# Altium PCB Displayd.PcbDoc
Units mil, origin at the board's own origin, x right, y up, seen from the top; angles counter-clockwise.
Board outline 3255 x 2645 mil, 2 copper layers (Top Layer, Bottom Layer); 12 components, 73 nets, 65 pads, 16 vias.
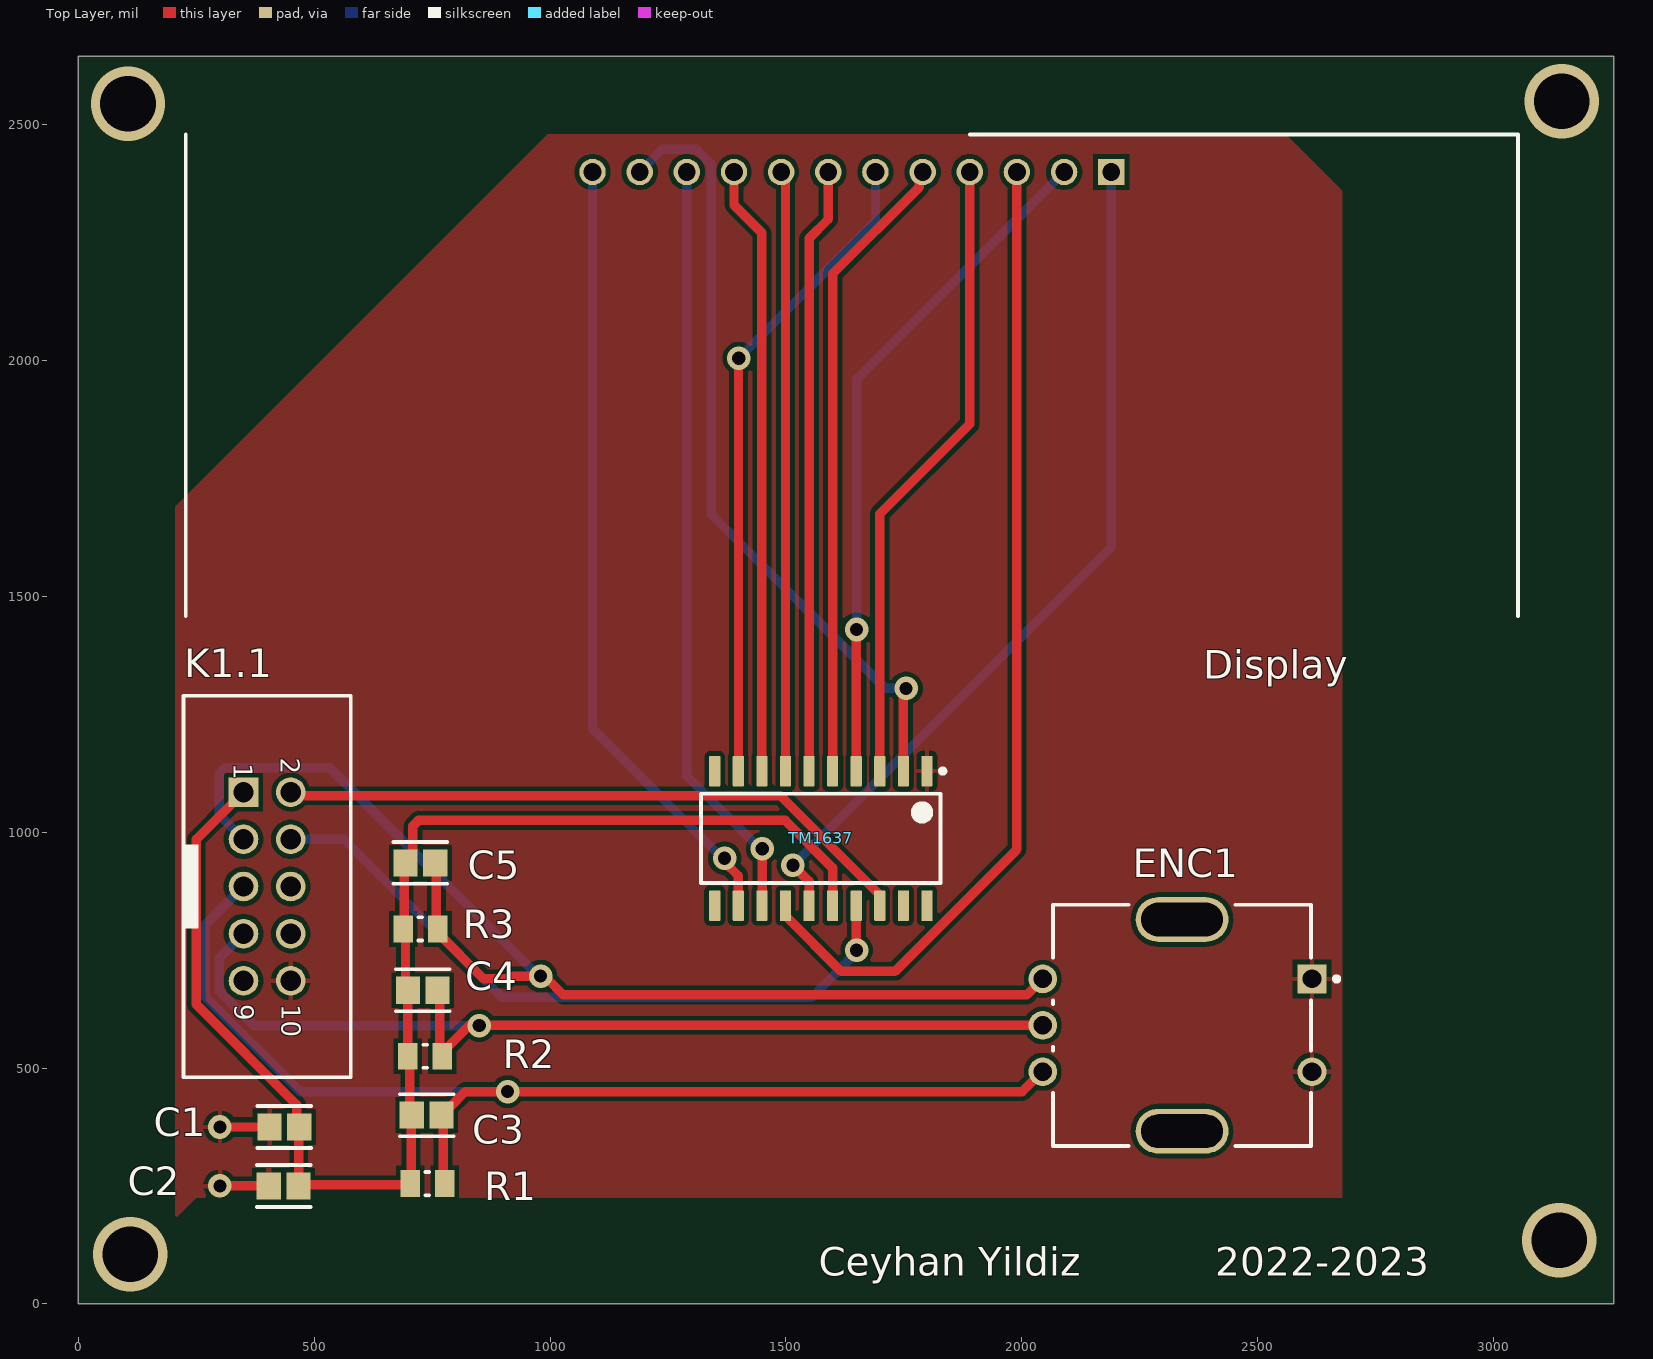
[diagram p0: Top Layer view]
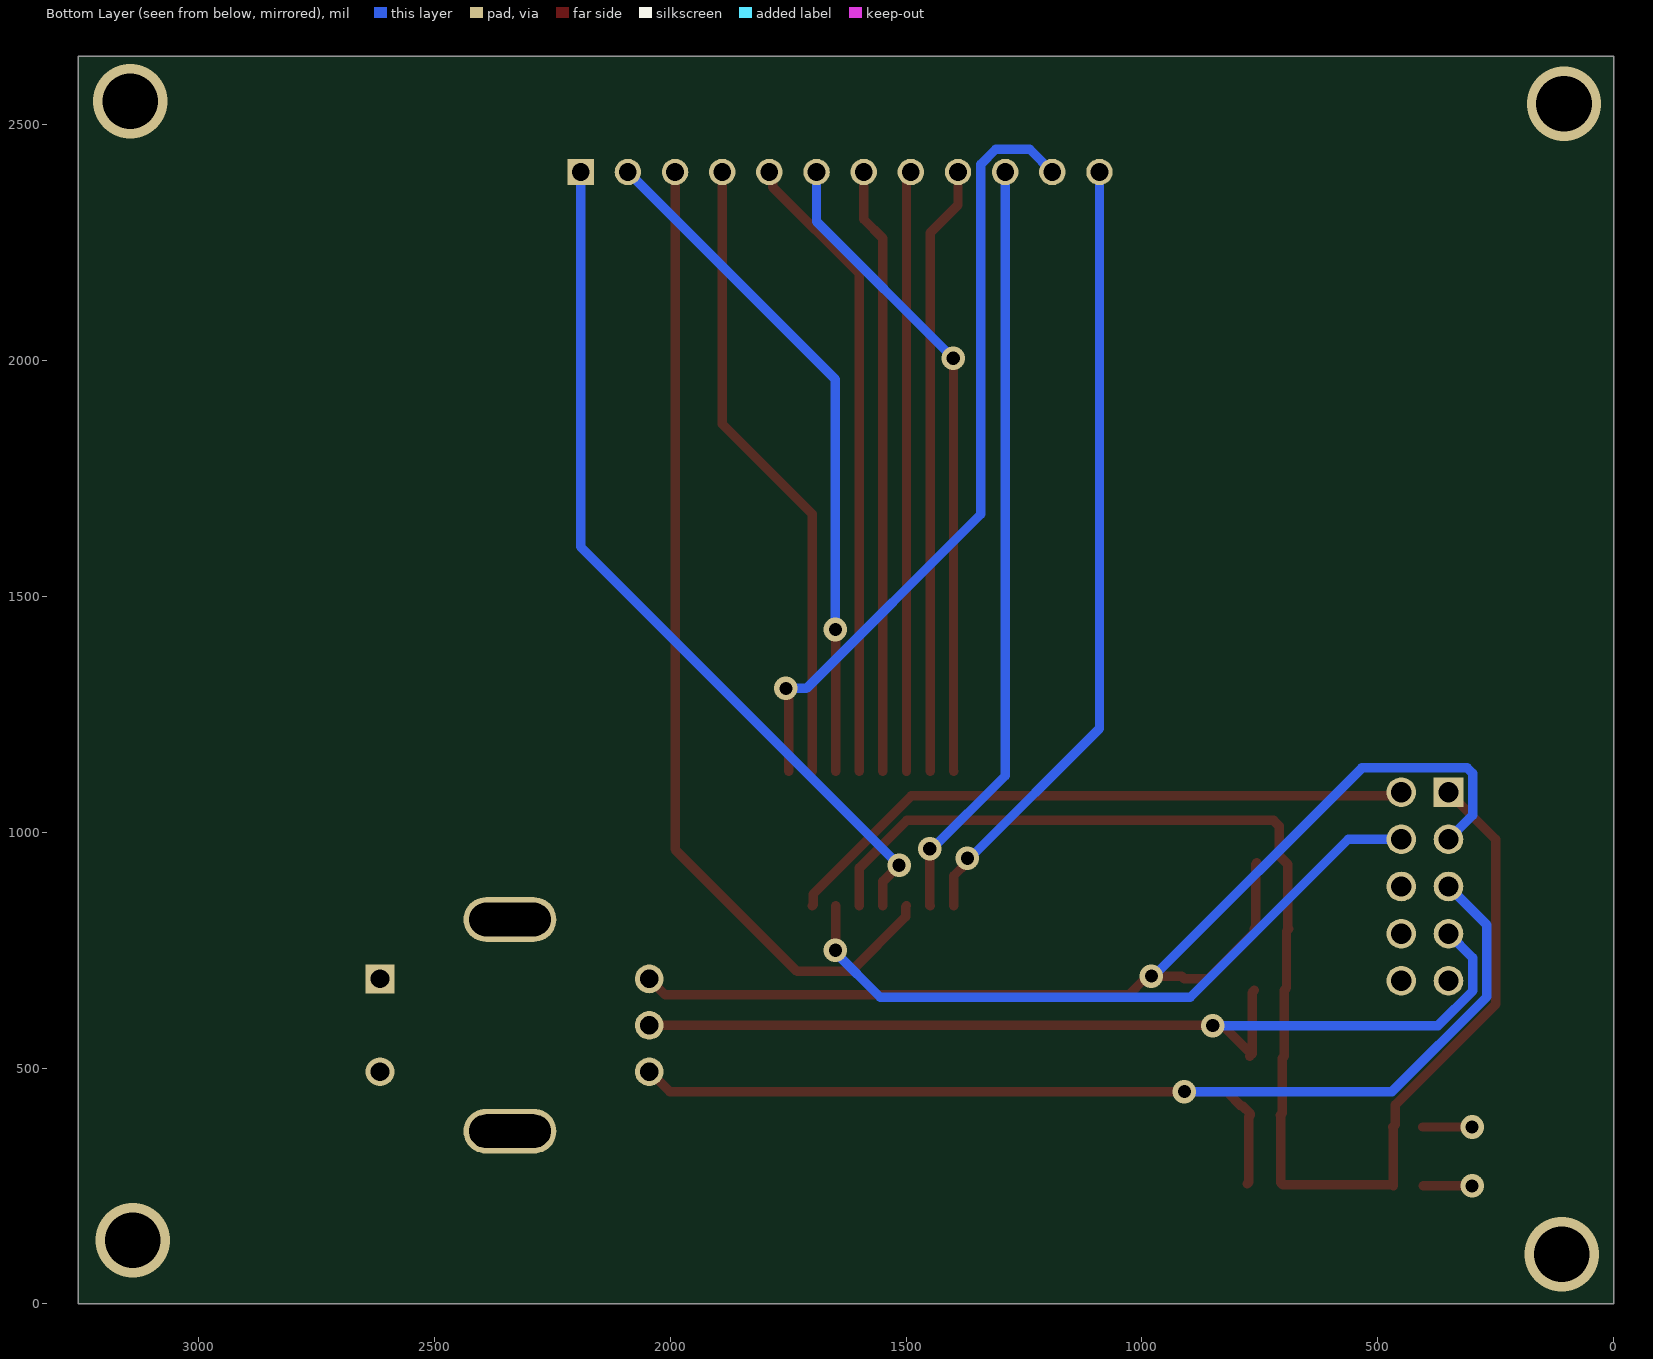
[diagram p1: Bottom Layer view, seen from below]
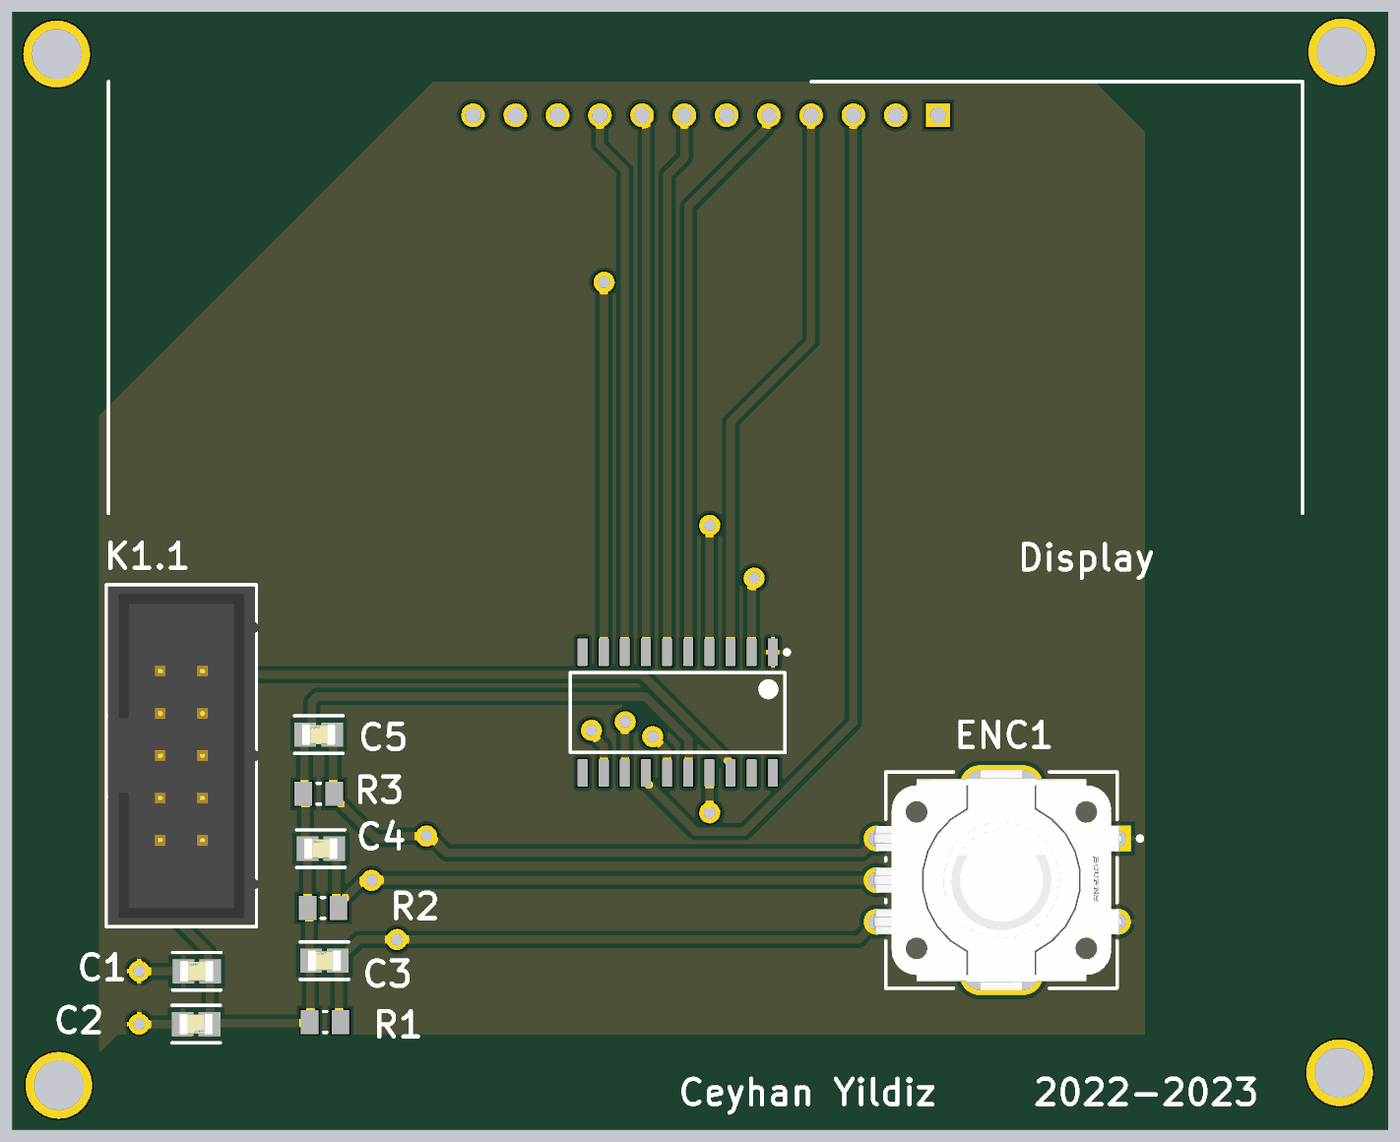
[diagram p2: 3D render of the assembled board from above, using the file's embedded part models]

## Layer stack, top to bottom
Top Solder: solder mask 0.4, Solder Resist, Dk 3.5
Top Layer: signal copper 1.4
Dielectric 1: dielectric 12.6, FR-4, Dk 4.8
Bottom Layer: signal copper 1.4
Bottom Solder: solder mask 0.4, Solder Resist, Dk 3.5

## Board outline
0,0 3255,0 3255,2645 0,2645

## Design rules (kind name [scope] priority, off if disabled: settings)
Clearance [All] p1: gap=10 ignorepadtopadclearanceinfootprint=FALSE except(0: Arc-Hole Track-Hole SMDPad-Hole THPad-Hole Via-Hole Fill-Hole Poly-Hole Region-Hole Text-Hole)
MinimumSolderMaskSliver [All] p1: minsoldermaskwidth=6
PolygonConnect [All] p1: connectstyle=Relief reliefconductorwidth=10 reliefentries=4 polygonreliefangle="90 Angle" airgapwidth=10
RoutingVias [All] p1: holewidth=28 width=50 viastyle="Through Hole" minholewidth=28 minwidth=50 maxholewidth=28 maxwidth=50
SilkToSolderMaskClearance [IsText] p1: minsilkscreentomaskgap=10 clearancetoexposedcopper=TRUE
SolderMaskExpansion [All] p1: expansion=4 istentingtop=FALSE
Width [All] p1: maxlimit=100 minlimit=10 preferedwidth=20
28 further rules are at their usual default settings.

## Components (designator, comment, footprint, x,y, rotation, side; value= is the part's Value field where it differs from the comment)
C1 "100µ 50V" CC_0805_L 436.53,375 r0 top
C2 "100n" CC_0805_L 435,250 r180 top value="0.22 μF"
C3 "10n" CC_0805_L 738.47,400 r0 top value="0.22 μF"
C4 "10n" CC_0805_L 730,665 r0 top value="0.22 μF"
C5 "10n" CC_0805_L 725,935 r0 top value="0.22 μF"
Display "Sigment" 7-Sigment 1890,2400 r270 top
ENC1 "ROTARY_ENCODER" PEC11R_4220F_S0012 2340,590.59 r270 top
K1.1 "61201021621" "box header 10-pin" 400,885 r270 top
R1 "10kΩ" R_0805_M 740,255 r180 top
R2 "10kΩ" R_0805_M 735,525 r180 top
R3 "10kΩ" R_0805_M 725,795 r180 top
TM1637 "TM1637" SOP_20_M 1574.15,986.98 r270 top

## Footprints (in the part's own frame and the unit in brackets; to place one, negate y for a bottom-side part, rotate by r counter-clockwise, add the part's x,y. Pads: shape width x height; smd on the part's side, far side on the other; paste and mask are expansions set on the pad)
7-Sigment [mm]
  rect 1.425x1.425 hole 0.95: 1(0,7.62)
  round 1.425 hole 0.95: 2(0,5.08) 3(0,2.54) 4(0,0) 5(0,-2.54) 6(0,-5.08) 7(0,-7.62) 8(0,-10.16) 9(0,-12.7) 10(0,-15.24) 11(0,-17.78) 12(0,-20.32)
  silkscreen extent -2.02,-42.23 23.93,29.53
"box header 10-pin" [mm] "10 pins, straight, gold plating"
  rect 1.6x1.6 hole 1.1: 1(-5.08,-1.27)
  round 1.6 hole 1.1: 2(-5.08,1.27) 3(-2.54,-1.27) 4(-2.54,1.27) 5(0,-1.27) 6(0,1.27) 7(2.54,-1.27) 8(2.54,1.27) 9(5.08,-1.27) 10(5.08,1.27)
  silkscreen extent -10.28,-4.5 10.28,4.5, body extent -10.18,-4.42 10.18,4.75, height 9.13
CC_0805_L [mil]
  rect 51.36x57.33 smd paste+0 mask+0: 1(-31.53,0) 2(31.53,0)
  silkscreen extent -57,-44 57,44, body extent -67,-39 67,39, height 10
PEC11R_4220F_S0012 [mm]
  rect 1.55x1.55 hole 1 paste-1000 mask+0: 1(-2.5,7)
  round 1.55 hole 1 paste-1000 mask+0: 2(2.5,7) A(-2.5,-7.5) B(2.5,-7.5) C(0,-7.5)
  rrect100% 2.4x5 hole 4.4 slot 1.8 at 0 deg paste-1000 mask+0: 3(-5.7,0) 4(5.7,0)
  silkscreen extent -6.5,-6.95 6.5,8.45, body extent -7,-8.37 7,7.88, height 0.25
R_0805_M [mm] "Chip Resistor, 2-Leads, Body 2.00x1.25mm, IPC Medium Density"
  rect 1.05x1.45 smd: 1(-0.925,0) 2(0.925,0)
  silkscreen extent -0.1,-0.62 0.1,0.62, body extent -1.1,-0.72 1.1,0.72, height 0.5
SOP_20_M [mm] "SOIC,20-Leads,Body 12.9x5.6mm,Pitch 1.27mm,IPC Medium Density"
  rrect17% 1.65x0.6 smd: 1(-3.625,5.715) 2(-3.625,4.445) 3(-3.625,3.175) 4(-3.625,1.905) 5(-3.625,0.635) 6(-3.625,-0.635) 7(-3.625,-1.905) 8(-3.625,-3.175) 9(-3.625,-4.445) 10(-3.625,-5.715) 11(3.625,-5.715) 12(3.625,-4.445) 13(3.625,-3.175) 14(3.625,-1.905) 15(3.625,-0.635) 16(3.625,0.635) 17(3.625,1.905) 18(3.625,3.175) 19(3.625,4.445) 20(3.625,5.715)
  silkscreen extent -3.75,-6.45 2.4,6.69, body extent -2.8,-6.45 2.8,6.45, height 2

## Part data
C1: library part Capacitor_Electrolytic, Manufacturer=Panasonic, Max Operating Temperature="105 degC", Min Operating Temperature="-55 degC", Package Quantity=500, Voltage Rating="25 V", ComponentLink1Description="Manufacturer URL", ComponentLink1URL=http://www.panasonic.com/, ComponentLink2Description=Datasheet, ComponentLink2URL=http://industrial.panasonic.com/cdbs/www-data/pdf/RDE0000/ABA0000C1181.pdf, DatasheetVersion=03/2016, Height="10.2 mm", Lead Pitch="3.1 mm", Length="10.2 mm", Mount="Surface Mount", Mounting Technology="Surface Mount", PackageDescription="2-Pin Electrolytic Aluminum Capacitor, Body 8.3 x 8.3 mm", PackageReference=EEE-FK1E221P, Packaging="Tape and Reel", Pins=2, REACH SVHC="No SVHC", RoHSCompliant=true
C2 C3 C4 C5: library part Capacitor_Ceramic, Capacitance="0.22 μF", Manufacturer=KEMET, Manufacturer Part Number=C0805C224K5RACTU, Package=C0805C-DN, Temperature="-55°C to +125°C", Temperature Characteristic=X7R, Temperature Coefficient=30ppm/°C, Temperature Range High=+125°C, Temperature Range Low=-55°C, Tolerance=0.1, Voltage Rating="50 V", Automotive=No, Category=Cap, ComponentLink2Description=Datasheet, ComponentLink2URL=https://content.kemet.com/datasheets/KEM_C1003_C0G_SMD.pdf, Device Class L1="Passive Components", Device Class L2=Capacitors, Device Class L3="Ceramic Capacitors", Digikey Description="CAP CER 0.22UF 50V X7R 0805", Height=0.88mm, Ipc Land Pattern Name=CAPC200125X78, Lead Free=Yes, Material=Ceramic, Mouser Description="CAP CER 0.22UF 50V X7R 0805", Octopart=https://octopart.com/c0805c224k5ractu-kemet-144670, RoHS=TRUE
Display: library part "Display 4digit 7segment"
ENC1: Current Rating=10mA, Manufacturer=Bourns, Manufacturer Part Number=PEC11R-4015F-N0024, Package=0, Temperature="-30°C to +70°C", Temperature Range High=+70°C, Temperature Range Low=-30°C, Voltage Rating Dc=5V, Automotive=No, Category=Enc, ComponentLink2Description=Datasheet, ComponentLink2URL=https://www.bourns.com/docs/product-datasheets/pec11r.pdf?sfvrsn=bb617cbf_7, Conn Orientation=Vertical, Detent=No, Device Class L1=Electromechanical, Device Class L2=Switches, Device Class L3=Encoders, Digikey Description="ROTARY ENCODER MECHANICAL 24PPR", Encoder Type=Incremental, Height=22.3mm, Lead Free=Yes, Mouser Description="Encoders 15mm SHAFT NO SWITCH", Number Of Circuits=1, Octopart=https://octopart.com/pec11r-4015f-n0024-bourns-26648251, Pulses Per Rev=24, RoHS=TRUE
K1.1: library part 5x2, "Male Box Header WR-BHD, THT, Vertical, pitch 2.54 mm, 10 pins", Contact Resistance=20mOhm, Manufacturer="Wurth Elektronik", Operating Temperature=-40to125degC, Withstanding Voltage=500VAC, Working Voltage=250VAC, Datasheet URL=https://katalog.we-online.de/em/datasheet/6120xx21621.pdf, Gender=Male, Manufacturer URL=http://www.we-online.de, Mounting Technology=THT, Orientation=Vertical, Package Reference=61201021621, Packaging=Tray, Part Number=61201021621, Pin Number=10, Pitch=2.54mm, Published Date=August2018, Publisher=WurthElektronik
R1 R2 R3: library part Resistor, Manufacturer="Vishay Dale", Part Number=CRCW08050000Z0EA
TM1637: "LED Drive Control Special Circuit", Package=Package, Availability="Not in stock", Check_prices=https://www.snapeda.com/parts/TM1637/Titan+Micro+Electronics/view-part/?ref=eda, MF="Titan Micro Electronics", MP=TM1637, Price=None, SnapEDA_Link=https://www.snapeda.com/parts/TM1637/Titan+Micro+Electronics/view-part/?ref=snap

## Via types
v1: diameter 50, hole 28, Top Layer to Bottom Layer, 12 vias
v2: diameter 157.48, hole 118.11, Top Layer to Bottom Layer, 4 vias

## Nets (pads, with @x,y where several pads share a name; then routed paths per layer and width w, separated by ;. In a path a pad name is that pad's centre, name@x,y a point inside that pad or via, vN(x,y) a via of type N, cw(c..) or ccw(c..) an arc to the next point about the centre after c; other vN are vias at no path point)
+5: C1.2 C2.1 C3.1 C4.1 C5.1 K1.1.1 R1.2 R2.2 R3.2 TM1637.16 | length 2997.9
  Top Layer w20: K1.1.1 250,985 250,635 463.05,421.95 463.05,380 C1.2 467.29,374.24 C2.1@467.29,250.76 ; C2.1 C2.1@467.29,250.76 ; TM1637.16 1599.15,924.35 1498.5,1025 720.87,1025 709.15,1013.28 709.15,950.68 691.03,932.55 691.03,797.45 R3.2 693.53,790.05 693.53,669.95 C4.1 698.53,664.95 698.53,525.05 R2.2 702.76,520.82 702.76,404.18 C3.1 705.26,398.32 705.26,256.68 R1.2 701.08,252.5 469.03,252.5 C2.1@467.29,250.76
D: 
GND: C1.1 C2.2 ENC1.1 ENC1.2 K1.1.10 TM1637.1 | length 208.5
  Top Layer w20: v1(300,250) C2.2 ; v1(300,375) C1.1
NetB2_1: 
NetC3_2: C3.2 ENC1.B K1.1.5 R1.1 | length 2454.7
  Top Layer w20: R1.1 773.21,258.21 773.21,396.79 C3.2 770,402.98 785.68,418.67 788.67,418.67 820.05,450.05 2001.26,450.05 2043.38,492.17 ENC1.B
  Bottom Layer w20: K1.1.5 268.5,803.5 268.5,651.24 469.75,450 v1(910,450)
NetC4_2: C4.2 ENC1.C K1.1.7 R2.1 | length 2145.1
  Top Layer w20: C4.2 766.47,660.05 766.47,529.95 R2.1 ; R2.1@771.42,532.87 v1@829.13,590.59 ; v1@850,590.59 ENC1.C
  Bottom Layer w20: K1.1.7 298.5,733.5 298.5,663.67 372.17,590 v1(850,590)
NetC5_2: C5.2 ENC1.A K1.1.3 R3.1 | length 2537.5
  Top Layer w20: C5.2 758.97,932.55 758.97,797.45 R3.1 761.42,787.13 859.53,689.02 909.84,689.02 915.83,695 966.14,695 972.13,689.02 980,689.02 980.24,689.26 993.86,689.26 1028.12,655 2010.71,655 ENC1.A
  Bottom Layer w20: K1.1.3 298.5,1036.5 298.5,1124.78 310.22,1136.5 533.5,1136.5 975,695 v1(980,695)
NetC6_1: 
NetC7_1: 
NetC11_1: 
NetC12_1: 
NetC13_1: 
NetC14_1: 
NetC14_2: 
NetD1_2: 
NetD2_1: 
NetDisplay_1: Display.1 TM1637.15 | length 1849.5
  Top Layer w20: v1(1515,930) 1549.15,895.85 TM1637.15
  Bottom Layer w20: v1(1515,930) 2190,1605 Display.1
NetDisplay_2: Display.2 TM1637.4 | length 1452.9
  Top Layer w20: TM1637.4 1649.58,1130.12 1649.58,1429.58 v1(1650,1430)
  Bottom Layer w20: v1(1650,1430) 1650,1960 Display.2
NetDisplay_3: Display.3 TM1637.14 | length 2104.5
  Top Layer w20: TM1637.14 1500.96,842.46 1500.96,821.06 1617.02,705 1731.28,705 1990,963.72 Display.3
NetDisplay_4: Display.4 TM1637.3 | length 1349.4
  Top Layer w20: TM1637.3 1699.15,1674.88 1890,1865.72 Display.4
NetDisplay_5: Display.5 TM1637.5 | length 1349.4
  Top Layer w20: TM1637.5 1599.15,2184.15 1783.09,2368.09 1783.09,2393.09 Display.5
NetDisplay_6: Display.6 TM1637.9 | length 1390.8
  Top Layer w20: TM1637.9 1399.58,1130.12 1399.58,2004.58 v1(1400,2005)
  Bottom Layer w20: v1(1400,2005) 1690,2295 Display.6
NetDisplay_7: Display.7 TM1637.6 | length 1286.8
  Top Layer w20: TM1637.6 1549.15,2259.15 1590,2300 Display.7@1590,2399.6
NetDisplay_8: Display.8 TM1637.7 | length 1274.1
  Top Layer w20: Display.8 1490,2390.23 1499.15,2381.08 TM1637.7
NetDisplay_9: Display.9 TM1637.8 | length 1294.8
  Top Layer w20: Display.9 1390,2330 1449.15,2270.85 TM1637.8
NetDisplay_10: Display.10 TM1637.13 | length 1625.3
  Top Layer w20: TM1637.13 1449.58,844.69 1449.58,964.58 v1(1450,965)
  Bottom Layer w20: Display.10 1290,1120 1445,965 v1(1450,965)
NetDisplay_11: Display.11 TM1637.2 | length 1670.5
  Top Layer w20: TM1637.2 1749.15,1291.03 1755,1296.88 v1(1755,1305)
  Bottom Layer w20: Display.11 1238.05,2448.05 1309.9,2448.05 1341.95,2416.01 1341.95,1674.41 1711.36,1305 v1(1755,1305)
NetDisplay_12: Display.12 TM1637.12 | length 1686.7
  Top Layer w20: v1(1370,945) 1370,936.88 1399.15,907.73 TM1637.12
  Bottom Layer w20: Display.12 1090,1220 1365,945 v1(1370,945)
NetIC1_1: 
NetIC1_2: 
NetIC1_6: 
NetIC1_7: 
NetIC3_1: 
NetIC3_2: 
NetIC3_3: 
NetIC3_10: 
NetIC3_30: 
NetIC3_38: 
NetIC3_39: 
NetIC3_41: 
NetIC3_44: 
NetIC3_45: 
NetIC3_46: 
NetIC3_47: 
NetIC3_48: 
NetIRF9Z34NPBF_1: 
NetIRF9Z34NPBF_3: 
NetK1.1_2: K1.1.2 TM1637.18 | length 1362.1
  Top Layer w20: K1.1.2 457.78,1077.22 1488.71,1077.22 1697.34,868.59 1697.34,846.08 TM1637.18
NetK1.1_4: K1.1.4 TM1637.17 | length 1477.7
  Top Layer w20: TM1637.17 1649.58,843.84 1649.58,750.42 v1(1650,750)
  Bottom Layer w20: K1.1.4 562.64,985 897.64,650 1555,650 1650,745 v1(1650,750)
NetK3_2: 
NetK8_1: 
NetK8_2: 
NetR7_2: 
NetR11_2: 
NetR17_1: 
NetR19_1: 
PC4: 
PC5: 
PD3: 
PD4: 
PD5: 
PD6: 
PD7: 
PE1: 
PE2: 
PE3: 
RXD: 
TXD: 
"VCC + 1.1": 
"VCC + 2.2": 
"VCC - 1.1": 
"VCC - 2.2": 
VIN: 
pads on no net: ENC1.3 ENC1.4 K1.1.6 K1.1.8 K1.1.9 TM1637.10 TM1637.11 TM1637.19 TM1637.20
copper on no net:
  other v2: 110,105 3140,135 105,2545 3145,2550

## Polygon pours and split planes (outlines as drawn)
GND on Top Layer "NONET_L-01_P-001" (solid, pour order 0): 995,2480 205,1690 205,180 250,225 2680,225 2680,2360 2560,2480

## Silkscreen, mask and mechanical layers (free items; w line width, h text height)
Top Overlay:
  text "Ceyhan Yildiz" at 1570,59.99 h60
  text "2022-2023" at 2410,60 h60

## Text inside footprints (layer, text, board x,y; h text height)
K1.1: Top Overlay "1" at 329.13,1146.42 h40 r270; Top Overlay "2" at 429.13,1158.23 h40 r270; Top Overlay "10" at 431.5,635.39 h40 r270; Top Overlay "9" at 331.5,635.39 h40 r270